# Altium PCB PCB.PcbDoc
Units mil, origin at the board's own origin, x right, y up, seen from the top; angles counter-clockwise.
Board outline 6000 x 4000 mil, 2 copper layers (Top Layer, Bottom Layer); 8 components, 10 nets, 55 pads, 0 vias.
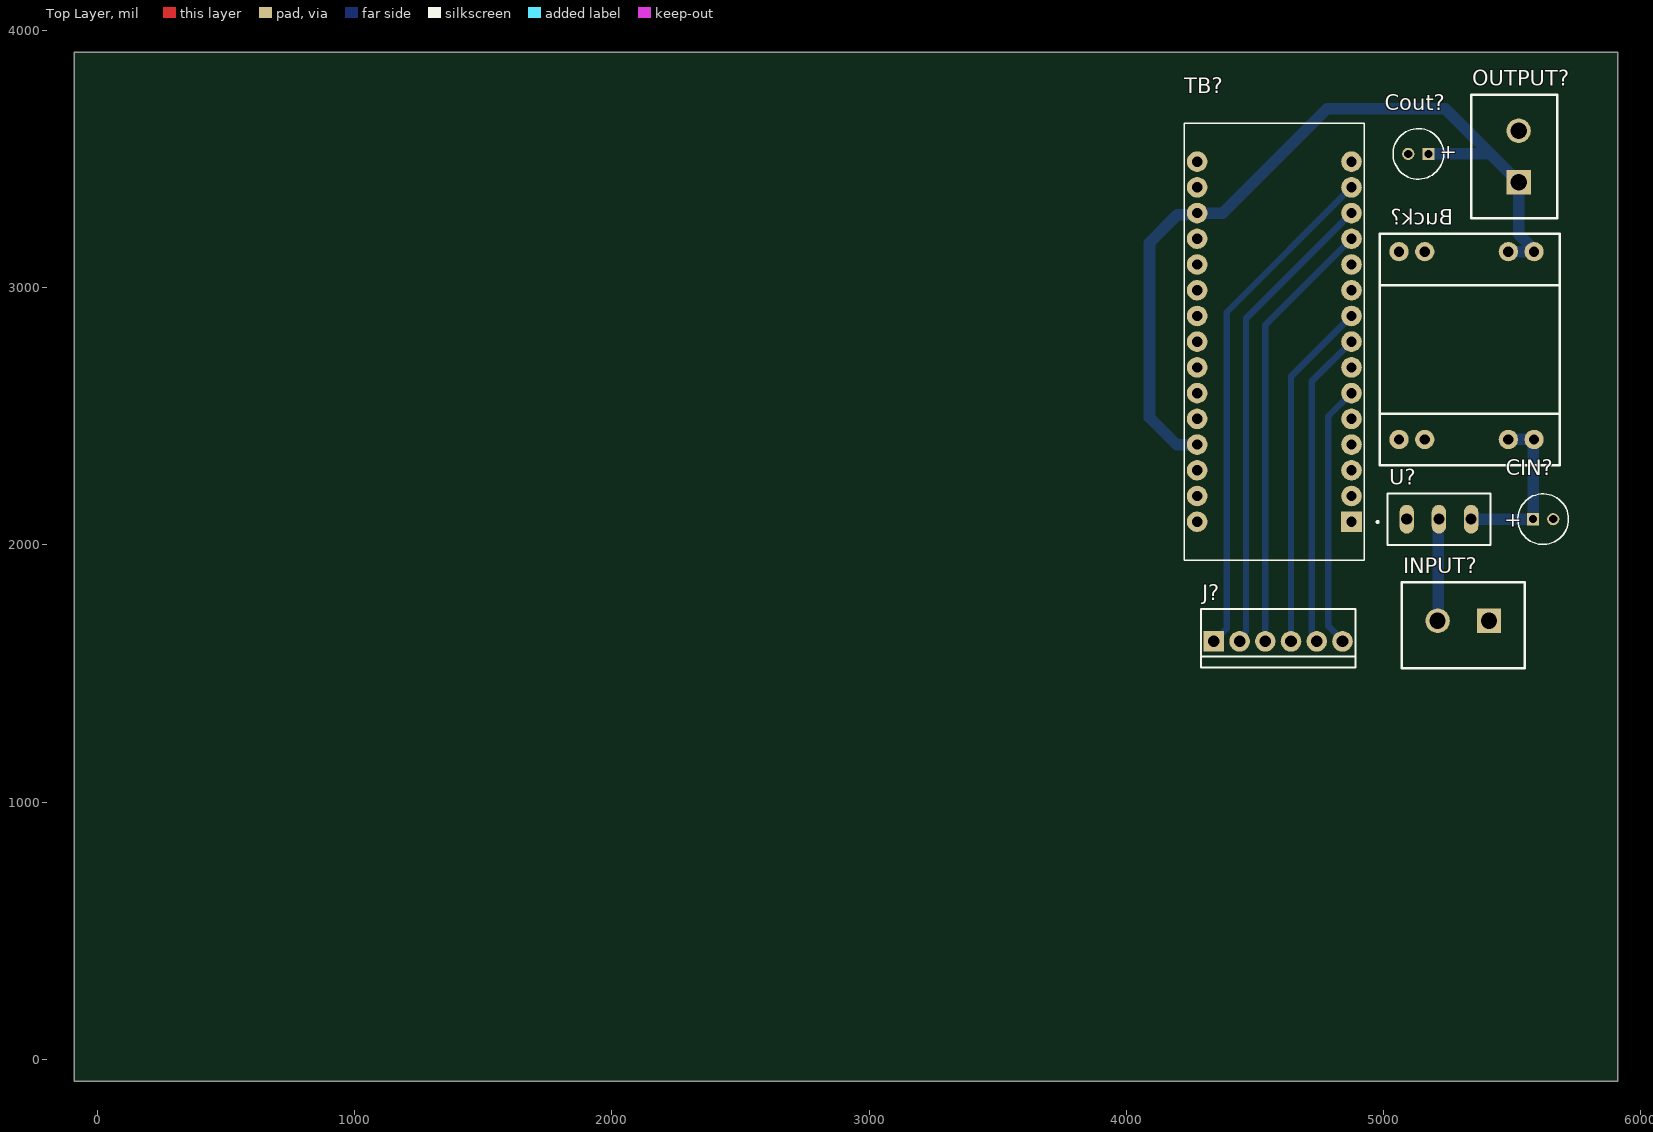
[diagram p0: Top Layer view]
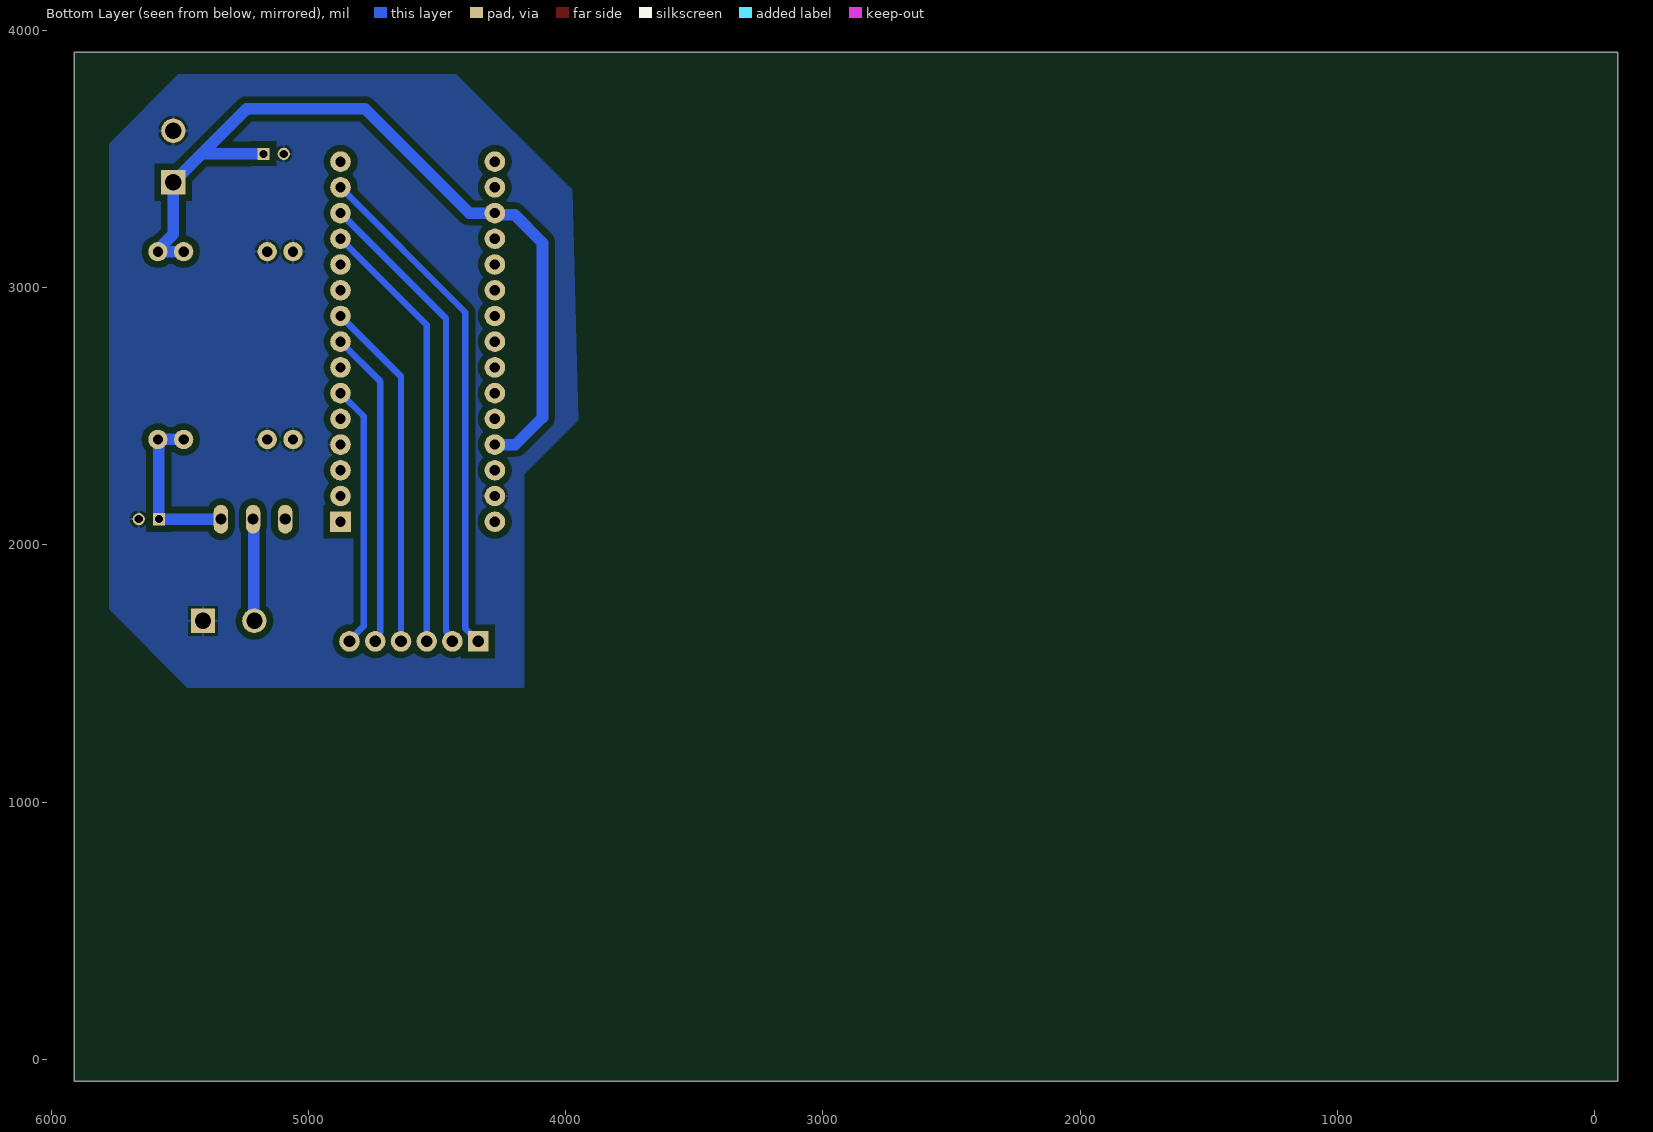
[diagram p1: Bottom Layer view, seen from below]
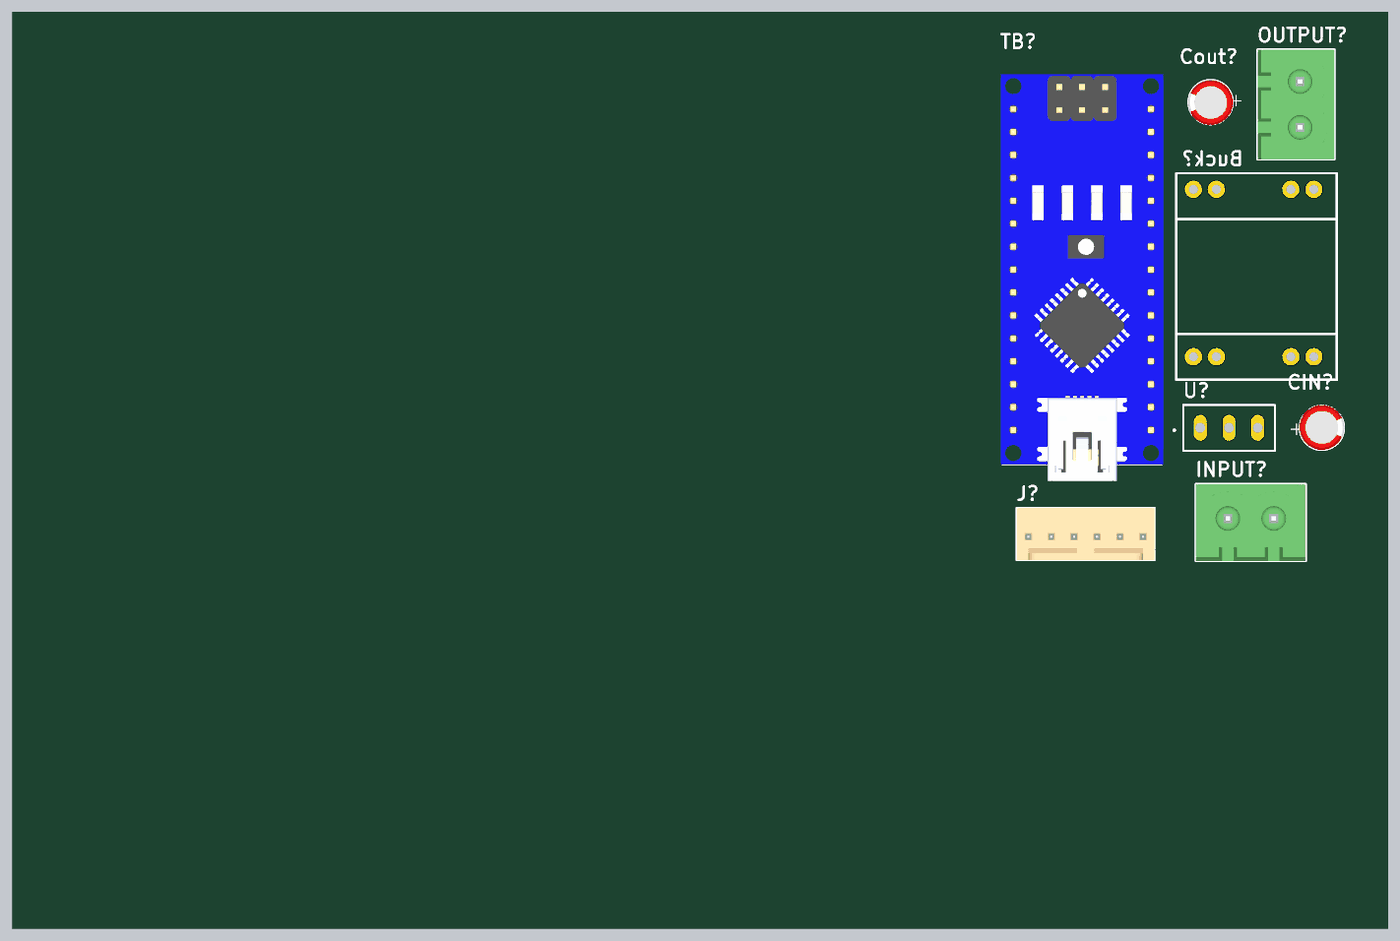
[diagram p2: 3D render of the assembled board from above, using the file's embedded part models]

## Layer stack, top to bottom
Top Solder: solder mask 0.4, Solder Resist, Dk 3.5
Top Layer: signal copper 1.4
Dielectric 1: dielectric 12.6, FR-4, Dk 4.8
Bottom Layer: signal copper 1.4
Bottom Solder: solder mask 0.4, Solder Resist, Dk 3.5

## Board outline
-90,-85 5910,-85 5910,3915 -90,3915

## Design rules (kind name [scope] priority, off if disabled: settings)
Clearance [All] p1: gap=25 ignorepadtopadclearanceinfootprint=FALSE except(0: Arc-Hole Track-Hole SMDPad-Hole THPad-Hole Via-Hole Fill-Hole Poly-Hole Region-Hole Text-Hole; 10: Arc-Arc Arc-Track Arc-SMDPad Arc-Text Track-Track Track-SMDPad Track-Text SMDPad-SMDPad SMDPad-Text THPad-Text Via-Text Fill-Text Poly-Text Region-Text Text-Text; 15: Arc-THPad Track-THPad SMDPad-THPad THPad-THPad)
PolygonConnect [All] p1: connectstyle=Relief reliefconductorwidth=10 reliefentries=4 polygonreliefangle="90 Angle" airgapwidth=10
RoutingVias [All] p1: holewidth=28 width=50 viastyle="Through Hole" minholewidth=28 minwidth=50 maxholewidth=28 maxwidth=50
SolderMaskExpansion [All] p1: expansion=4 istentingtop=FALSE
Width [All] p1: maxlimit=45 minlimit=15 preferedwidth=25 minimp=50.000000 maximp=50.000000 favimp=50.000000
30 further rules are at their usual default settings.

## Components (designator, comment, footprint, x,y, rotation, side; value= is the part's Value field where it differs from the comment)
Buck? "MP1584 Buck Convertor" MP1584 5585,2410 r90 top
CIN? "10 μF" "WCAP-AT1H 5x11x2x0.5" 5620,2100 r0 top
Cout? "10 μF" "WCAP-AT1H 5x11x2x0.5" 5135,3520 r180 top
INPUT? "691311500102" 691311500102 5310,1705 r180 top
J? "61900611121" 61900611121 4590,1625 r180 top
OUTPUT? "691311500102" 691311500102 5525,3510 r90 top
TB? "ARDUINO_NANO" SHIELD_ARDUINO_NANO 4575,2790 r180 top
U? "SLIDE_SWITCH" SPDT 5215,2100 r180 top

## Footprints (in the part's own frame and the unit in brackets; to place one, negate y for a bottom-side part, rotate by r counter-clockwise, add the part's x,y. Pads: shape width x height; smd on the part's side, far side on the other; paste and mask are expansions set on the pad)
61900611121 [mil] "2.54mm Male Locking Header, 6p"
  rect 80x80 hole 45: 1(250,0)
  round 80 hole 45: 2(150,0) 3(50,0) 4(-50,0) 5(-150,0) 6(-250,0)
  silkscreen extent -301,-126 301,102, body extent -300,-126 300,102, height 455
691311500102 [mm] "5,08mm - PCB Headers - Vertical - Closed ends -02p"
  rect 2.4x2.4 hole 1.6: 1(-2.54,0)
  round 2.4 hole 1.6: 2(2.54,0)
  silkscreen extent -6.08,-3.8 6.08,4.7, body extent -6.08,-3.8 6.08,4.7, height 12.02
MP1584 [mil]
  round 75 hole 40: 1(0,0) 2(0,100) 3(0,425) 4(0,525) 5(730,525) 6(730,425) 7(730,100) 8(730,0)
  silkscreen extent -100,-100 800,600
SHIELD_ARDUINO_NANO [mil]
  rect 80x80 hole 40: 1(-300,700)
  round 80 hole 40: 2(-300,600) 3(-300,500) 4(-300,400) 5(-300,300) 6(-300,200) 7(-300,100) 8(-300,0) 9(-300,-100) 10(-300,-200) 11(-300,-300) 12(-300,-400) 13(-300,-500) 14(-300,-600) 15(-300,-700) 16(300,-700) 17(300,-600) 18(300,-500) 19(300,-400) 20(300,-300) 21(300,-200) 22(300,-100) 23(300,0) 24(300,100) 25(300,200) 26(300,300) 27(300,400) 28(300,500) 29(300,600) 30(300,700)
  silkscreen extent -406,-850 350,850, body extent -354,-850 354,921, height 496
SPDT [mil]
  oval 56x112 hole 43.31: 1(-125,0) 2(0,0) 3(125,0)
  silkscreen extent -200,-100 200,100
"WCAP-AT1H 5x11x2x0.5" [mm] "Polarized capacitors, Aluminum Electrolytic Capacitors, 2-Leads, Body 5x11x2x0.5"
  rect 1.206x1.206 hole 0.8: 1(-1,0)
  round 1.206 hole 0.8: 2(1,0)
  silkscreen extent -2.5,-2.5 2.5,2.5, body extent -2.48,-2.45 2.48,2.54, height 11.26

## Part data
CIN? Cout?: library part "WCAP-AT1H 5x11x2x0.5 860240672002", "WCAP-AT1H Aluminum Electrolytic Capacitors , 10 μF; + / - 20%; 50 V , 5 x 11", Manufacturer="Wurth Elektronik", partNo=860240672002, Application="Medium and high voltage type range from 160V-450V used as primary side input filter in power supply; Low voltage type used as energy storage or low frequency filtering in circuit, applied to general switching power supply, AC-DC converter, adapter, charger, TV, VCR, DC motor circuit filter, digital audio, digital cameras, digital video cameras, satellite receiver etc.", Capacitance="10 μF", Characteristics="Aluminum Electrolytic Capacitor; Recommended soldering: Wave; Operating temperature:–40 °C to +105 °C for UR < 400 V; –25 °C to +105 °C for UR ≥ 400 V; Long life product series; Higher permissible ripple current; Load life: 5000–10000 h @ +105 °C", ComponentLink1Description=Manufacturer, ComponentLink1URL=http://www.we-online.com, ComponentLink2Description=Datasheet, ComponentLink2URL=http://katalog.we-online.de/pbs/datasheet/860240672002.pdf, Created by="Karrer Zheng", Created Date=6/8/2015, E-mail=libraries@we-online.com
INPUT? OUTPUT?: "WR-TBL Serie 311 - 5.08 mm Close Vertical PCB Header, 02p", ComponentLink1Description=Manufacturer, ComponentLink1URL=http://www.we-online.de, ComponentLink2Description=Datasheet, ComponentLink2URL=http://katalog.we-online.de/em/datasheet/6913115001xx.pdf, Part Number=691311500102, Pin Number=02p, Pitch="5.08 mm", Published Date="Feb. 2017", Publisher="Wurth Elektronik"
J?: "WR-WTB 2.54mm Male Locking Header, 6p", ComponentLink1Description=Manufacturer, ComponentLink1URL=http://www.we-online.de, ComponentLink2Description=Datasheet, ComponentLink2URL=http://katalog.we-online.de/em/datasheet/6190xx11121.pdf, Part Number=61900611121, Pin Number=6, Pitch="2.54 mm", Published Date="June 2017", Publisher="Wurth Elektronik"
TB?: "Small, complete, and breadboard-friendly board based on the ATmega328 (Arduino Nano 3.x)", Package="Non-Standard Arduino", Availability="Not in stock", Check_prices=https://www.snapeda.com/parts/Arduino%20Nano/Arduino/view-part/?ref=eda, MF=Arduino, MP="Arduino Nano", Price=None, SnapEDA_Link=https://www.snapeda.com/parts/Arduino%20Nano/Arduino/view-part/?ref=snap

## Nets (pads, with @x,y where several pads share a name; then routed paths per layer and width w, separated by ;. In a path a pad name is that pad's centre, name@x,y a point inside that pad or via, vN(x,y) a via of type N, cw(c..) or ccw(c..) an arc to the next point about the centre after c; other vN are vias at no path point)
5V: Buck?.7 Buck?.8 Cout?.1 OUTPUT?.1 TB?.18 TB?.27 | length 3312.4
  Bottom Layer w45: TB?.27 4195,2390 4090,2495 4090,3175 4198.3,3283.3 4268.3,3283.3 TB?.18 4375,3290 4780,3695 5240,3695 5415,3520 ; Cout?.1 5415,3520 ; Buck?.7 Buck?.8 5585,3148.12 5525,3208.12 OUTPUT?.1 5415,3520
12V: INPUT?.2 U?.2 | length 397.1
  Bottom Layer w45: INPUT?.2 5212.9,1707.9 5212.9,2097.9 U?.2
AIN_1: J?.5 TB?.8 | length 1237.5
  Bottom Layer w25: J?.5 4740,1639.88 4720,1659.88 4720,2635 TB?.8
AIN_2: J?.4 TB?.9 | length 1362.3
  Bottom Layer w25: J?.4 4640,2655 TB?.9
BIN_1: J?.3 TB?.12 | length 1703.8
  Bottom Layer w25: J?.3 4540,2855 TB?.12
BIN_2: J?.2 TB?.13 | length 1845.2
  Bottom Layer w25: J?.2 4440,1639.88 4465,1664.88 4465,2880 TB?.13
GND: Buck?.3 Buck?.4 Buck?.5 Buck?.6 CIN?.2 Cout?.2 INPUT?.1 OUTPUT?.2 TB?.4 TB?.29
NetBuck?_1: Buck?.1 Buck?.2 CIN?.1 U?.1 | length 631.8
  Bottom Layer w45: U?.1 CIN?.1@5560,2100 ; Buck?.2 Buck?.1 5581.87,2406.87 5581.87,2101.24 CIN?.1
PWMA: J?.6 TB?.6 | length 1025.1
  Bottom Layer w25: J?.6 4840,1629.5 4785,1684.5 4785,2500 TB?.6
PWMB: J?.1 TB?.14 | length 1986.6
  Bottom Layer w25: J?.1 4390,1675 4390,2905 TB?.14
pads on no net: TB?.1 TB?.2 TB?.3 TB?.5 TB?.7 TB?.10 TB?.11 TB?.15 TB?.16 TB?.17 TB?.19 TB?.20 TB?.21 TB?.22 TB?.23 TB?.24 TB?.25 TB?.26 TB?.28 TB?.30 U?.3

## Polygon pours and split planes (outlines as drawn)
GND on Bottom Layer "GND_L02_P001" (solid, remove dead copper, pour order 1): 3975,3380 4425,3830 5505,3830 5775,3560 5775,1750 5470,1445 4165,1445 4160,1440 4160,2275 3950,2485

## Text inside footprints (layer, text, board x,y; h text height)
CIN?: Top Overlay "+" at 5469.41,2070.98 h59.06
Cout?: Top Overlay "+" at 5285.59,3549.02 h59.06 r180